# EAGLE board teabox_analog (EAGLE 4.11)
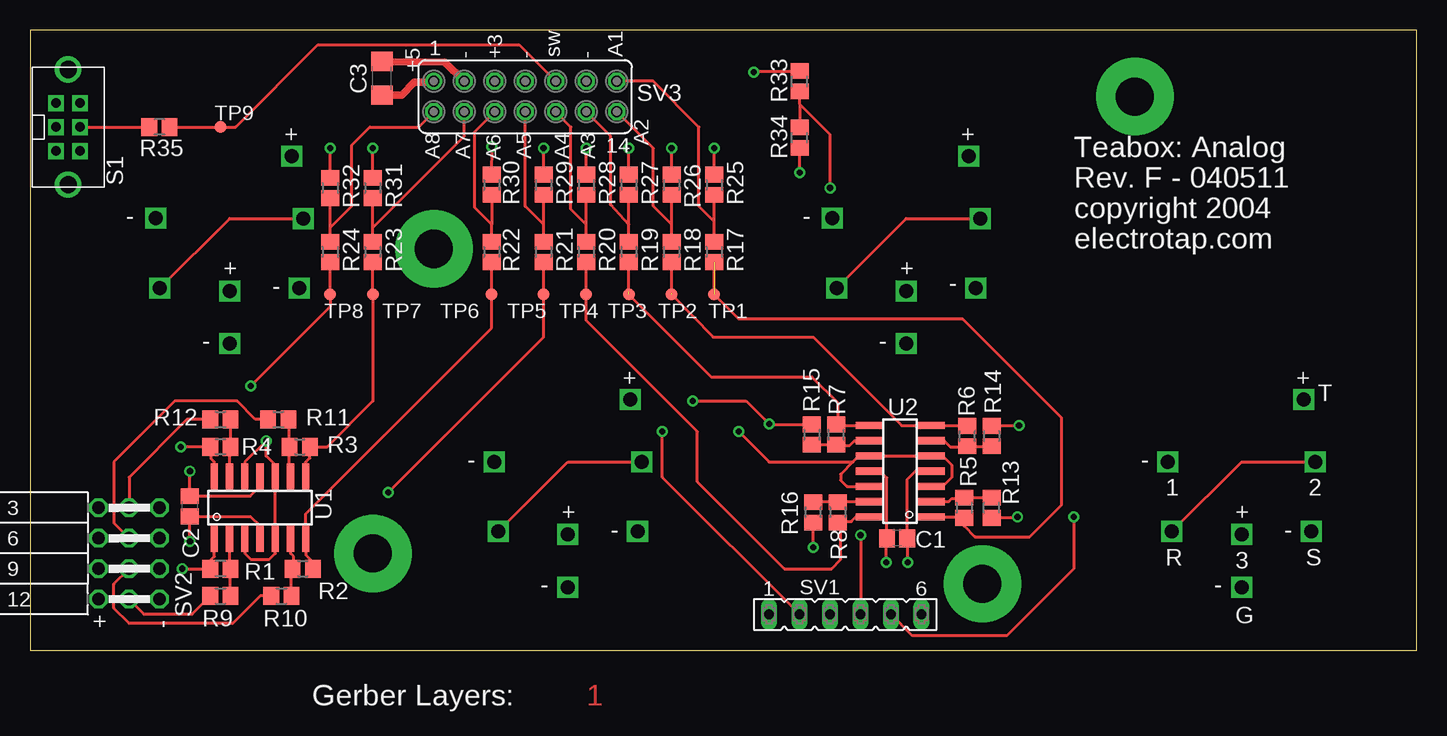
[diagram p0: board, top side]
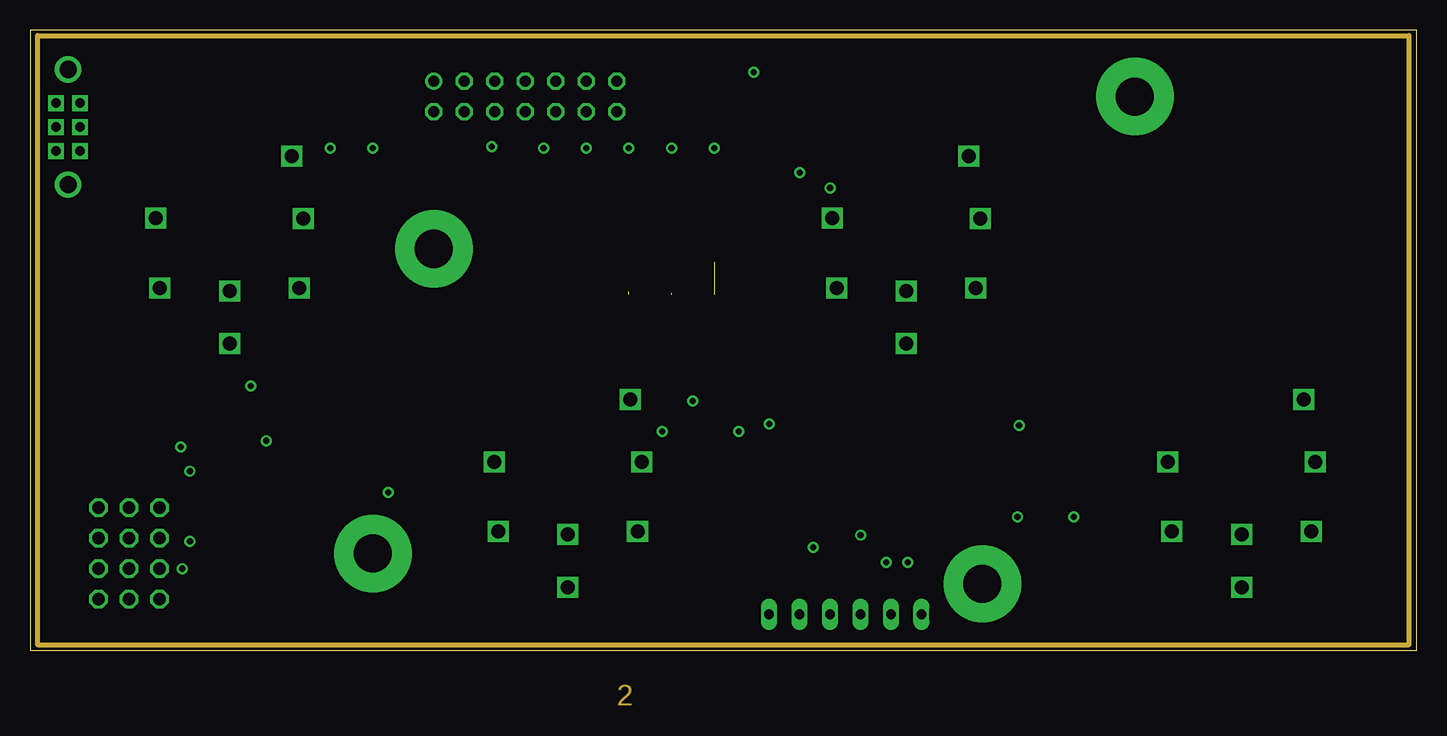
[diagram p1: board, inner layer $GND]
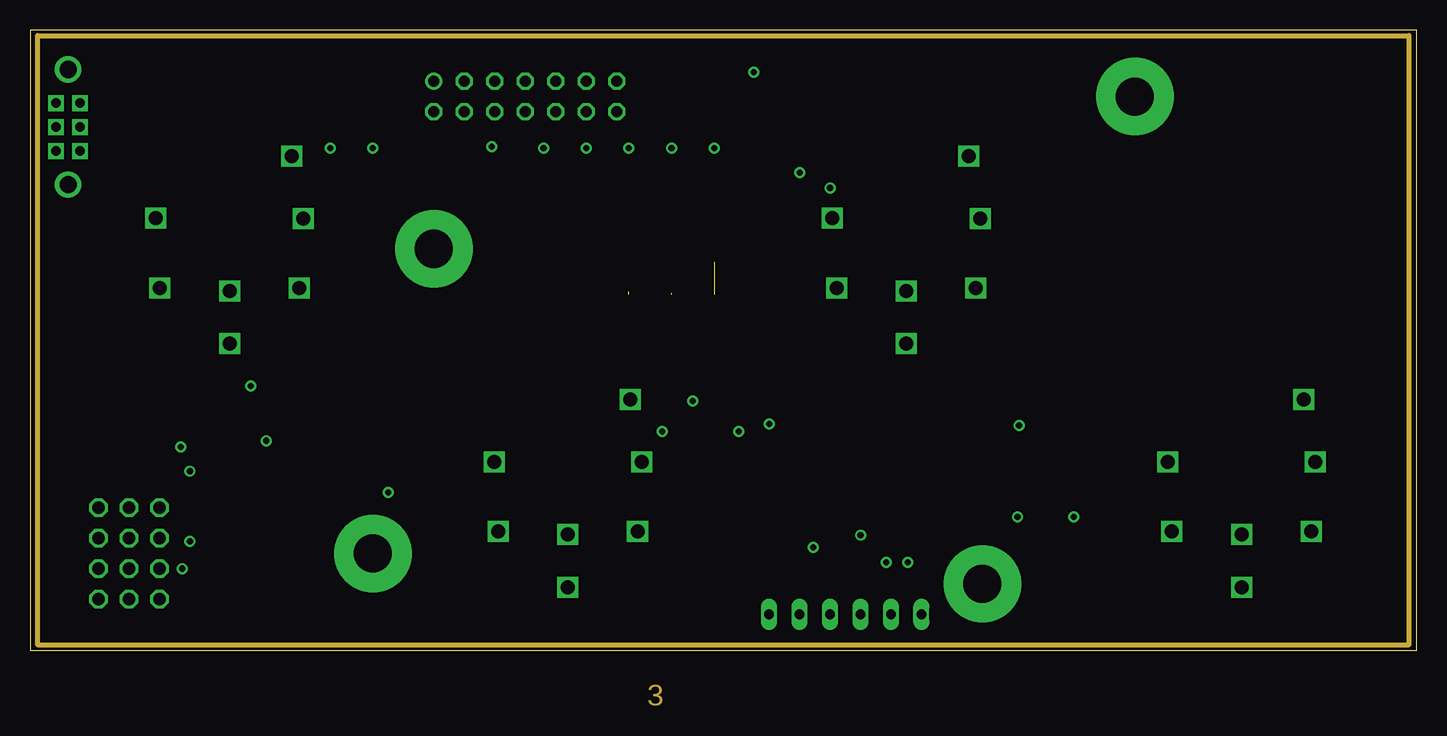
[diagram p2: board, inner layer $+5V]
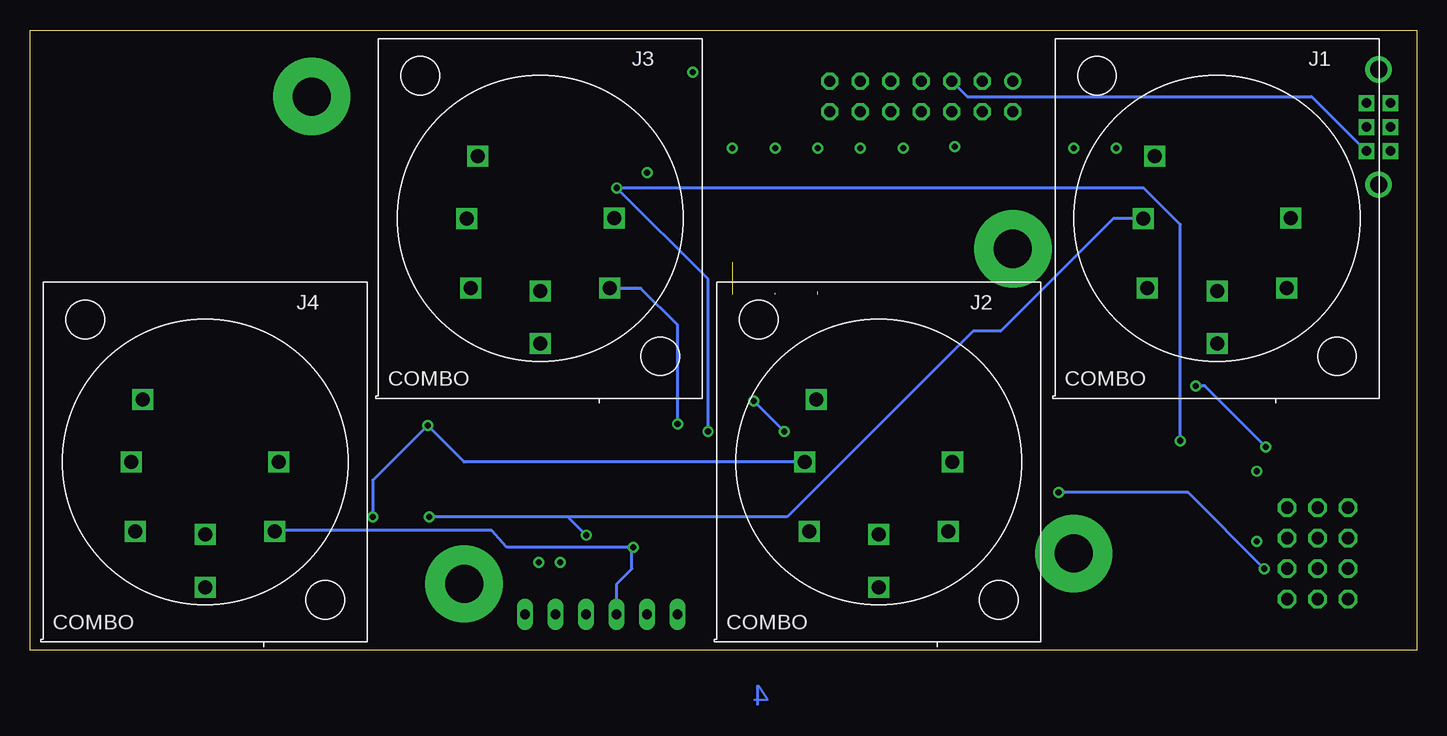
[diagram p3: board, bottom side, seen from below]

Size 115.55 x 51.74 mm. Coordinates in mm from the lower left corner, seen from the top.
Outline: 0,0 115.55,0 115.55,51.74 0,51.74 0,0
Copper layers (1*2+15*16): Top 0.035mm / dielectric 1.5mm / $GND 0.035mm / dielectric 0.15mm / $+5V 0.035mm / dielectric 0.2mm / Bottom 0.035mm
Design rules "default": minimum track width 10mil, minimum drill 20mil, track to track 8mil, track to pad 8mil, pad to pad 8mil, via to via 8mil, smd to smd 8mil, copper to edge 40mil, drill to drill 8mil, minimum pad ring 10mil, minimum via ring 8mil, stop-mask expansion 4mil, vias tented up to drill 0mil, thermal gap 10mil

## Footprints (pad centres in the part's own frame; a part is rotated, then mirrored left to right if it is on the bottom)
C0805 = smd 1.3 x 1.5: 1 -0.85,0; 2 0.85,0
C1206 = smd 1.6 x 1.8: 1 -1.4,0; 2 1.4,0
NEUTRIK_COMBO_CONNECTOR = drill 1.168 square: P$1 -6.15,0; P$2 0,-6.05; P$3 6.15,0.025; P$4 -5.2,5.2; P$5 5.8,-5.8; P$6 -5.8,-5.8; P$7 0,-10.45
R0805 = smd 1.3 x 1.5: 1 -0.85,0; 2 0.85,0
SWITCH-EG2211 = drill 1.422 pad 2.184 round: GND@1 -4.8,0; GND@2 4.8,0 | drill 0.813 pad 0.813 square: IN1 0,1; IN2 0,-1; OUT1A -2,1; OUT1B 2,1; OUT2A -2,-1; OUT2B 2,-1
FE06 = drill 0.813 long: 1 -6.35,0; 2 -3.81,0; 3 -1.27,0; 4 1.27,0; 5 3.81,0; 6 6.35,0
HEADER-FE-3X4-RA = drill 1.016 octagon: 1 -5.08,3.81; 2 -5.08,1.27; 3 -5.08,-1.27; 4 -2.54,3.81; 5 -2.54,1.27; 6 -2.54,-1.27; 7 0,3.81; 8 0,1.27; 9 0,-1.27; 10 2.54,3.81; 11 2.54,1.27; 12 2.54,-1.27
FE07-2 = drill 0.914 round: 1 -7.62,1.27 | drill 0.914 octagon: 2 -7.62,-1.27; 3 -5.08,1.27; 4 -5.08,-1.27; 5 -2.54,1.27; 6 -2.54,-1.27; 7 0,1.27; 8 0,-1.27; 9 2.54,1.27; 10 2.54,-1.27; 11 5.08,1.27; 12 5.08,-1.27; 13 7.62,1.27; 14 7.62,-1.27
TP10R = smd 1 x 1: TP 0,0
SO14 = smd 0.6 x 2.2: 1 -3.81,-2.6; 2 -2.54,-2.6; 3 -1.27,-2.6; 4 0,-2.6; 5 1.27,-2.6; 6 2.54,-2.6; 7 3.81,-2.6; 8 3.81,2.6; 9 2.54,2.6; 10 1.27,2.6; 11 0,2.6; 12 -1.27,2.6; 13 -2.54,2.6; 14 -3.81,2.6

## Placement (x,y rotation side)
C1  0.1uF  [C0805]  72.26,9.36 180 top
C2  0.1uF  [C0805]  13.33,12.03 90 top
C3  10uF  [C1206]  29.33,47.71 90 top
J1  COMBO  [NEUTRIK_COMBO_CONNECTOR]  16.63,36.03 0 bottom
J2  COMBO  [NEUTRIK_COMBO_CONNECTOR]  44.83,15.71 0 bottom
J3  COMBO  [NEUTRIK_COMBO_CONNECTOR]  73.02,36.03 0 bottom
J4  COMBO  [NEUTRIK_COMBO_CONNECTOR]  100.96,15.71 0 bottom
R1  12K  [R0805]  15.87,6.82 180 top
R2  12K  [R0805]  22.73,6.82 0 top
R3  12K  [R0805]  22.47,16.98 0 top
R4  12K  [R0805]  15.87,16.98 180 top
R5  12K  [R0805]  77.85,11.9 270 top
R6  12K  [R0805]  78.1,17.87 90 top
R7  12K  [R0805]  67.18,18 90 top
R8  12K  [R0805]  67.3,11.52 270 top
R9  9.09K  [R0805]  15.87,4.53 0 top
R10  9.09K  [R0805]  20.95,4.53 0 top
R11  9.09K  [R0805]  20.7,19.27 0 top
R12  9.09K  [R0805]  15.87,19.27 0 top
R13  9.09K  [R0805]  80.13,11.9 90 top
R14  9.09K  [R0805]  80.13,17.87 270 top
R15  9.09K  [R0805]  65.15,18 270 top
R16  9.09K  [R0805]  65.27,11.52 90 top
R17  8.25K  [R0805]  57.02,33.24 270 top
R18  8.25K  [R0805]  53.46,33.24 270 top
R19  8.25K  [R0805]  49.91,33.24 270 top
R20  8.25K  [R0805]  46.35,33.24 270 top
R21  8.25K  [R0805]  42.79,33.24 270 top
R22  8.25K  [R0805]  38.48,33.24 270 top
R23  8.25K  [R0805]  28.57,33.24 270 top
R24  8.25K  [R0805]  25.01,33.24 270 top
R25  16K  [R0805]  57.02,38.82 270 top
R26  16K  [R0805]  53.46,38.82 270 top
R27  16K  [R0805]  49.91,38.82 270 top
R28  16K  [R0805]  46.35,38.82 270 top
R29  16K  [R0805]  42.79,38.82 270 top
R30  16K  [R0805]  38.48,38.82 270 top
R31  16K  [R0805]  28.57,38.57 270 top
R32  16K  [R0805]  25.01,38.57 270 top
R33  10K  [R0805]  64.13,47.46 90 top
R34  10K  [R0805]  64.13,42.76 90 top
R35  10K  [R0805]  10.79,43.65 180 top
S1  SWITCH-EG2211  [SWITCH-EG2211]  3.17,43.65 270 top
SV1  [FE06]  67.94,3.01 0 top
SV2  [HEADER-FE-3X4-RA]  6.98,6.82 270 top
SV3  [FE07-2]  41.27,46.19 0 top
TP1  PTR1TP10R  [TP10R]  57.02,29.68 0 top
TP2  PTR1TP10R  [TP10R]  53.46,29.68 0 top
TP3  PTR1TP10R  [TP10R]  49.91,29.68 0 top
TP4  PTR1TP10R  [TP10R]  46.35,29.68 0 top
TP5  PTR1TP10R  [TP10R]  42.79,29.68 0 top
TP6  PTR1TP10R  [TP10R]  38.48,29.68 0 top
TP7  PTR1TP10R  [TP10R]  28.57,29.68 0 top
TP8  PTR1TP10R  [TP10R]  25.01,29.68 0 top
TP9  PTR1TP10R  [TP10R]  15.87,43.65 0 top
U1  [SO14]  19.17,11.9 0 top
U2  [SO14]  72.51,14.95 90 top

## Library data of the parts
C1-C3 J1-J4 S1 SV2 U1 U2 = TEABOX-LIB
R1-R35 = rcl
SV1 SV3 = con-lsta
TP1-TP9 = testpad

## Nets
+3V3: S1.OUT1B SV3.5
+5V: C1.1 C2.1 C3.1 J1.P$2 J1.P$4 J2.P$2 J2.P$4 J3.P$2 J3.P$4 J4.P$2 J4.P$4 R33.2 SV1.1 SV2.3 SV2.6 SV2.9 SV2.12 SV3.1 U1.4 U2.4
GND: C1.2 C2.2 C3.2 J1.P$3 J1.P$6 J1.P$7 J2.P$3 J2.P$6 J2.P$7 J3.P$3 J3.P$6 J3.P$7 J4.P$3 J4.P$6 J4.P$7 R25.1 R26.1 R27.1 R28.1 R29.1 R30.1 R31.1 R32.1 R34.1 S1.OUT1A SV1.6 SV2.1 SV2.4 SV2.7 SV2.10 SV3.3 SV3.7 SV3.11 U1.11 U2.11
N$1: R2.2 R22.2 TP6.TP U1.7
N$2: R33.1 R34.2 U1.3 U1.5 U1.10 U1.12 U2.3 U2.5 U2.10 U2.12
N$3: R1.2 R21.2 TP5.TP U1.1
N$4: J1.P$1 J1.P$5 R13.1 SV1.4
N$5: J2.P$1 J2.P$5 R14.1 SV1.5
N$6: J3.P$1 J3.P$5 R15.1 SV1.2
N$7: R1.1 R9.2 U1.2
N$9: R21.1 R29.2 SV3.8
N$17: R22.1 R30.2 SV3.6
N$18: R2.1 R10.2 U1.6
N$19: R23.1 R31.2 SV3.4
N$20: R3.1 R11.2 U1.9
N$21: R24.1 R32.2 SV3.2
N$22: R4.1 R12.2 U1.13
N$23: R17.1 R25.2 SV3.13
N$24: R18.1 R26.2 SV3.14
N$25: R5.1 R13.2 U2.2
N$26: R6.1 R14.2 U2.6
N$27: R19.1 R27.2 SV3.12
N$28: R7.1 R15.2 U2.9
N$29: R20.1 R28.2 SV3.10
N$30: R8.1 R16.2 U2.13
N$31: J4.P$1 J4.P$5 R16.1 SV1.3
N$33: R12.1 SV2.2
N$35: R11.1 SV2.5
N$38: R10.1 SV2.8
N$40: R9.1 SV2.11
N$42: R5.2 R17.2 TP1.TP U2.1
N$43: R6.2 R18.2 TP2.TP U2.7
N$44: R7.2 R19.2 TP3.TP U2.8
N$45: R8.2 R20.2 TP4.TP U2.14
N$46: R4.2 R24.2 TP8.TP U1.14
N$47: R3.2 R23.2 TP7.TP U1.8
N$50: R35.1 SV3.9 TP9.TP
N$51: R35.2 S1.IN1

## Tracks (layer width: path | path; a pad name or v marks a point on that pad's centre or on a via)
+3V3
  Bottom 0.254: SV3.5 37.46,46.19 8.76,46.19 4.19,41.62 4.17,41.63 S1.OUT1B
+5V  (via drill 0.51)
  Top 0.254: v13.33,9.11 C2.1 18.37,11.18 19.17,10.38 U1.4 | U2.4 73.78,14.95 73.11,14.27 C1.1 73.02,9.36 73.15,9.23 v73.15,7.33 | R33.2 60.41,48.31 v60.32,48.22
  Top 0.61: C3.1 30.98,46.32 32.04,47.37 33.56,47.37 SV3.1
GND  (via drill 0.51, 3.17 pad 6.45)
  Top 0.254: v13.33,14.95 C2.2 18.37,12.88 19.17,13.68 U1.11 | R32.1 v25.01,41.87 | R31.1 v28.57,41.87 | R30.1 38.52,42.04 v38.48,42 | R29.1 v42.79,41.87 | R28.1 v46.35,41.87 | R27.1 v49.91,41.87 | 53.46,42.13 v53.46,41.87 R26.1 | R25.1 v57.02,41.87 57.06,41.91 | U2.11 70.86,14.95 71.41,14.4 C1.2 71.5,9.36 71.37,9.23 v71.37,7.33 | v64.13,39.84 R34.1
  Top 0.61: C3.2 34.58,49.07 SV3.3
  other vias: 28.57,8.09 33.65,33.49 79.37,5.55 92.07,46.19
N$1
  Top 0.254: R22.2 38.48,29.93 38.73,29.68 TP6.TP 38.48,26.89 22.98,11.39 U1.7 | U1.7 22.98,9.23 | U1.7 22.98,7.96 23.49,7.46 23.49,6.82 R2.2
N$2  (via drill 0.51)
  Top 0.254: U1.3 17.9,8.09 18.41,7.58 19.93,7.58 20.44,8.09 U1.5 U1.10 20.44,15.46 19.68,16.22 v19.68,17.49 17.9,15.71 U1.12 | 64.13,45.55 R33.1 | U2.10 U2.5 76.07,16.22 76.83,15.46 76.83,14.44 76.07,13.68 U2.3 | v66.67,38.57 66.67,43.02 64.13,45.55 | 64.13,45.55 64.13,46.95 | 64.13,45.55 R34.2 | 68.57,15.71 67.56,14.69 67.56,14.19 68.07,13.68 U2.12 | 68.57,15.71 69.08,16.22 | v59.05,18.25 61.59,15.71 68.57,15.71
  Top 0.406: 69.08,16.22 U2.10
  Bottom 0.254: v59.05,18.25 59.05,30.95 v66.67,38.57 22.74,38.57 19.68,35.51 v19.68,17.49
N$3  (via drill 0.51)
  Top 0.254: R21.2 TP5.TP 42.79,26.12 v29.84,13.17 | R1.2 15.11,6.82 | v12.7,6.82 R1.2 | R1.2 15.02,7.49 15.36,7.84 U1.1
  Bottom 0.254: v29.84,13.17 19.04,13.17 v12.7,6.82
N$4  (via drill 0.51)
  Top 0.254: J1.P$5 16.63,36.03 J1.P$1 | R13.1 82.2,11.05 v82.29,11.14 | v69.21,9.61 SV1.4
  Bottom 0.254: 70.73,11.14 52.45,11.14 36.95,26.63 34.67,26.63 25.27,36.03 J1.P$1 | 70.73,11.14 v82.29,11.14 | 70.73,11.14 v69.21,9.61
N$5  (via drill 0.51)
  Top 0.254: J2.P$5 44.83,15.71 J2.P$1 | R14.1 82.46,18.72 v82.42,18.76 | SV1.5 73.53,1.23 81.4,1.23 86.99,6.82 v86.99,11.14
  Bottom 0.254: 50.92,15.71 J2.P$1 79.37,15.71 v82.42,18.76 86.99,14.19 v86.99,11.14
N$6  (via drill 0.51)
  Top 0.254: J3.P$5 73.02,36.03 J3.P$1 | 61.63,18.85 R15.1 | SV1.2 52.7,14.44 v52.7,18.25 | v55.24,20.79 59.69,20.79 v61.59,18.88
  Top 0.406: v61.59,18.88 61.63,18.85
  Bottom 0.254: v61.59,18.88 61.59,27.14 64.64,30.19 67.18,30.19 J3.P$5 | v52.7,18.25 v55.24,20.79
N$7
  Top 0.254: U1.2 16.63,6.82 R1.1 16.63,6.73 16.63,4.45 | 16.63,4.28 16.63,4.45 | 16.63,4.45 R9.2
N$9
  Top 0.254: 42.79,38.06 R29.2 42.79,35.52 | R21.1 42.79,35.52 | SV3.8 41.27,37.05 42.79,35.52
N$17
  Top 0.254: 38.48,38.06 R30.2 38.48,35.52 | R22.1 38.48,35.52 | 38.48,35.52 37.08,36.92 37.08,43.27 SV3.6
N$18
  Top 0.254: U1.6 21.71,8.09 21.97,7.84 21.97,6.82 R2.1 21.71,6.65 21.71,4.53 R10.2
N$19
  Top 0.254: 28.57,37.81 R31.2 R23.1 28.57,35.27 36.19,42.89 SV3.4
N$20
  Top 0.254: U1.9 21.71,14.69 21.62,14.78 R3.1 21.71,16.98 21.55,17.15 R11.2
N$21
  Top 0.254: 25.01,38.06 R32.2 25.01,35.27 | R24.1 25.01,35.27 | SV3.2 32.38,43.65 28.32,43.65 26.79,42.13 26.79,37.05 25.01,35.27
N$22
  Top 0.254: U1.13 16.63,16.98 R4.1 16.72,18.92 16.63,19.01 16.72,19.1 R12.2
N$23
  Top 0.254: 57.02,38.06 R25.2 57.02,35.78 | R17.1 57.02,35.78 | SV3.13 51.94,47.46 55.75,43.65 55.75,37.05 57.02,35.78
N$24
  Top 0.254: 53.46,38.32 R26.2 53.46,35.52 | R18.1 53.46,35.52 | SV3.14 51.94,41.87 51.94,37.05 53.46,35.52
N$25
  Top 0.254: U2.2 76.58,12.41 76.83,12.66 77.97,12.66 77.88,12.75 R5.1 80.22,12.75 | 80.22,12.75 R13.2 | 80.22,12.75 80.26,12.79
N$26
  Top 0.254: 80.17,17.02 R14.2 | R6.1 80.17,17.02 | 80.17,17.02 80.13,17.11 | U2.6 76.19,17.49 76.7,16.98 78.1,16.98
  Top 0.406: 78.1,16.98 R6.1
N$27
  Top 0.254: 49.91,38.32 R27.2 49.91,35.52 | R19.1 49.91,35.52 | SV3.12 48.38,42.89 48.38,37.17 49.91,35.52
N$28
  Top 0.254: U2.9 68.7,17.49 68.32,17.11 67.18,17.11 | R7.1 65.19,17.15
  Top 0.406: R7.1 67.18,17.11 | R15.2 65.15,17.11 65.19,17.15
N$29
  Top 0.254: 46.35,38.32 R28.2 46.35,35.52 | R20.1 46.35,35.52 | SV3.10 45.08,43.65 45.08,36.79 46.35,35.52
N$30
  Top 0.254: U2.13 67.18,12.41 67.22,12.37 R8.1 65.31,12.37 65.27,12.41 R16.2
N$31  (via drill 0.51)
  Top 0.254: J4.P$5 100.96,15.71 J4.P$1 | v65.27,8.6 R16.1
  Bottom 0.254: 65.4,8.6 v65.27,8.6 | 65.4,8.6 75.81,8.6 77.08,10 95.12,10 J4.P$5 | SV1.3 66.67,5.55 65.4,6.82 65.4,8.6
N$33
  Top 0.254: R12.1 13.08,19.27 8.25,14.44 SV2.2
N$35
  Top 0.254: R11.1 18.79,19.27 17.27,20.79 12.06,20.79 6.98,15.71 6.98,10.63 SV2.5
N$38
  Top 0.254: R10.1 19.17,4.53 16.89,2.25 8.25,2.25 6.98,3.52 6.98,5.55 SV2.8
N$40
  Top 0.254: R9.1 13.5,3.01 9.52,3.01 SV2.11
N$42  (1 unrouted)
  Top 0.254: R17.2 TP1.TP 59.05,27.65 77.72,27.65 85.97,19.39 85.97,12.15 83.31,9.49 78.73,9.49 77.85,10.38 R5.2 77.88,11.05 77.97,11.14 U2.1
N$43  (1 unrouted)
  Top 0.254: R18.2 TP2.TP 56.93,26.12 65.27,26.12 72.64,18.76 75.18,18.76 | R6.2 78.06,18.76 75.18,18.76 | 75.18,18.76 U2.7
N$44  (1 unrouted)
  Top 0.254: 67.43,18.76 U2.8 | R19.2 TP3.TP 56.76,22.82 65.15,22.82 67.3,20.66 67.3,18.88 67.18,18.76 R7.2
  Top 0.406: R7.2 67.27,18.85 67.3,18.88 67.43,18.76
N$45
  Top 0.254: U2.14 68.83,11.14 68.45,10.76 67.43,10.76 | R8.2 67.3,10.76 67.43,10.76 | 67.43,10.76 67.56,10.63 67.56,7.58 66.8,6.82 62.86,6.82 55.62,14.06 55.62,18.25 46.35,27.52 TP4.TP R20.2
N$46  (via drill 0.51)
  Top 0.254: U1.14 15.36,15.71 15.11,15.96 15.11,16.73 14.98,16.85 | R4.2 14.85,16.98 14.98,16.85 | v18.41,22.06 25.01,28.66 TP8.TP R24.2 | 14.98,16.85 15.11,16.98 v12.57,16.98
  Bottom 0.254: v18.41,22.06 17.65,22.06 v12.57,16.98
N$47
  Top 0.254: U1.8 22.98,15.71 23.32,16.05 R3.2 24.76,16.98 28.57,20.79 TP7.TP R23.2
N$50
  Top 0.254: SV3.9 40.76,50.51 24,50.51 17.14,43.65 TP9.TP R35.1
N$51
  Top 0.254: S1.IN1 R35.2
N$52
  $+5V 0.406: 0.63,0.47 114.93,0.47 114.93,51.27 0.63,51.27 0.63,0.47
N$53
  $GND 0.406: 0.63,0.47 0.63,51.27 114.93,51.27 114.93,0.47 0.63,0.47

## Text on the board
Top: 1
$GND: 2
$+5V: 3
Bottom: 4
tPlace: - | +3 | - | sw | - | A1 | +5 | + | A2 | + | A8 | A7 | A5 | A4 | A3 | Teabox: Analog | A6 | Rev. F - 040511 | copyright 2004 | - | - | electrotap.com | + | + | - | - | - | - | + | + | T | - | - | 1 | 2 | + | + | - | - | R | S | 3 | - | - | G | + | - | Gerber Layers: